# Altium PCB Root.PcbDoc
Units mm, origin at the board's own origin, x right, y up, seen from the top; angles counter-clockwise.
Board outline 42.75 x 55.75 mm, 2 copper layers (Top Layer, Bottom Layer); 56 components, 34 nets, 199 pads, 46 vias.
Unrouted connection lines stored in the file: 140.
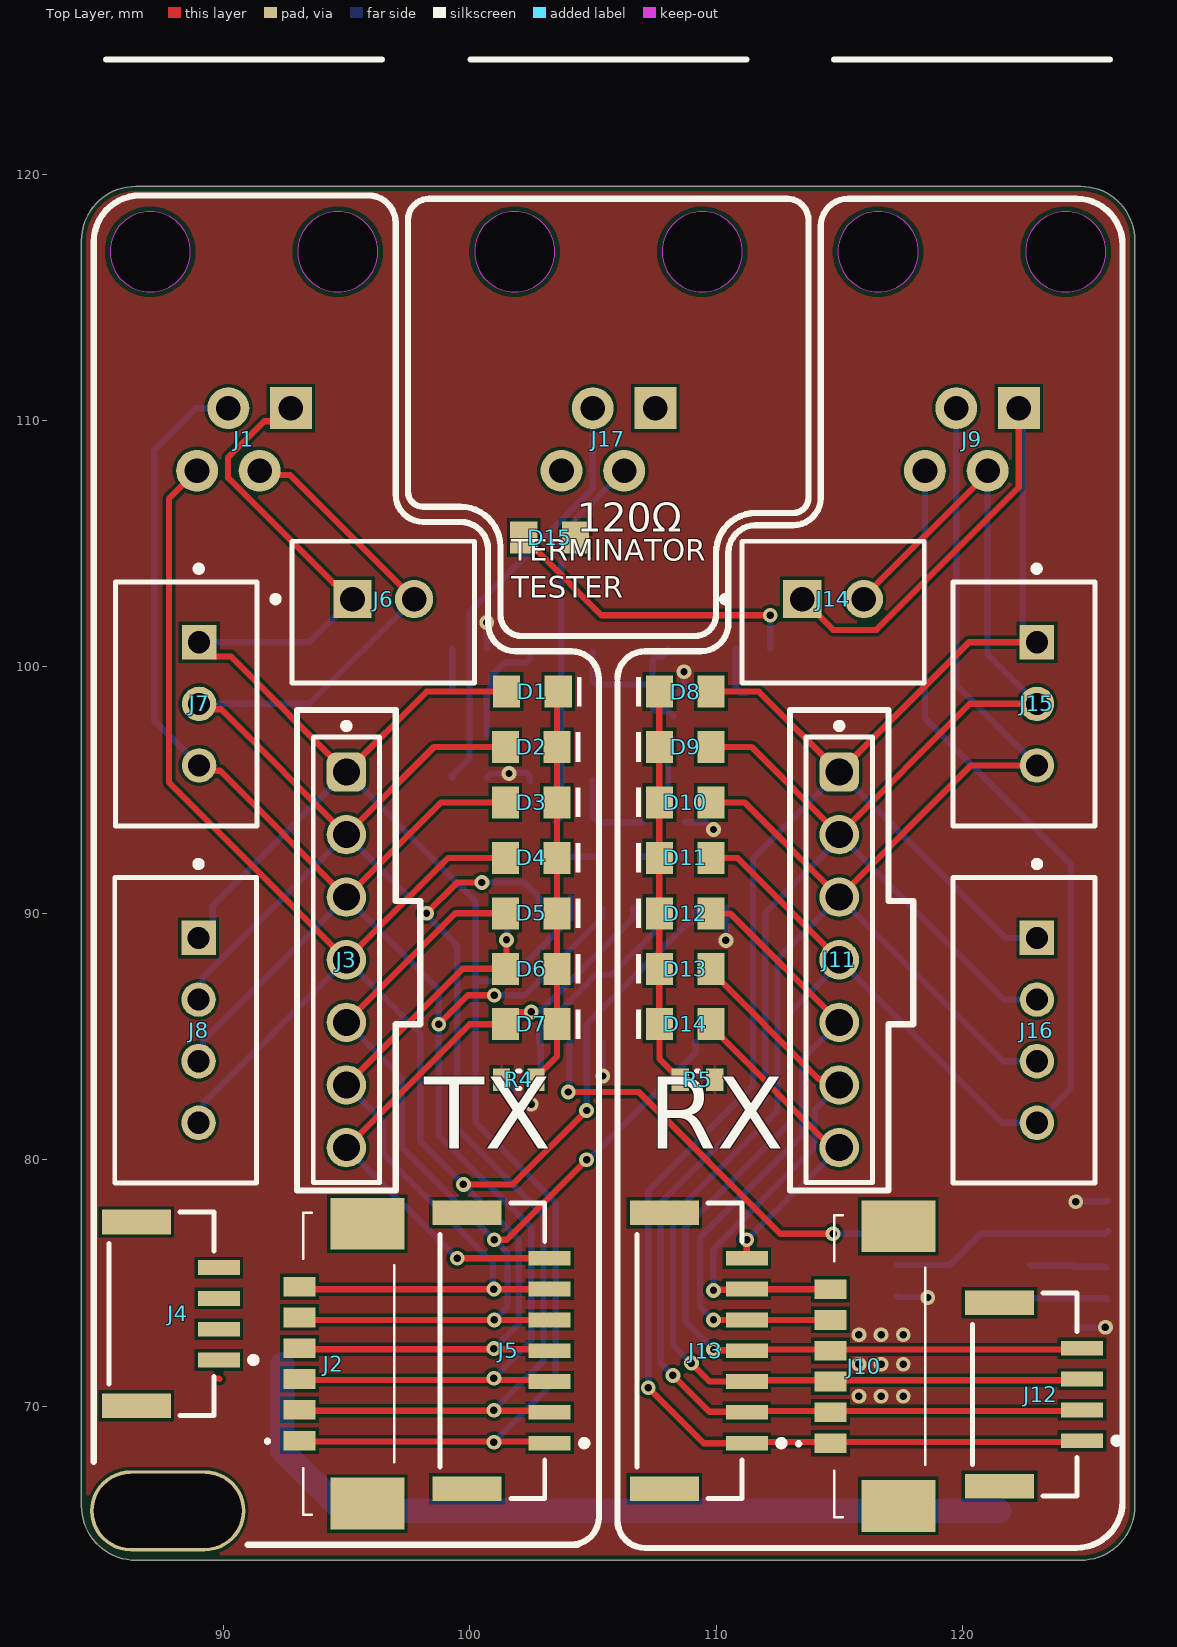
[diagram p0: Top Layer view]
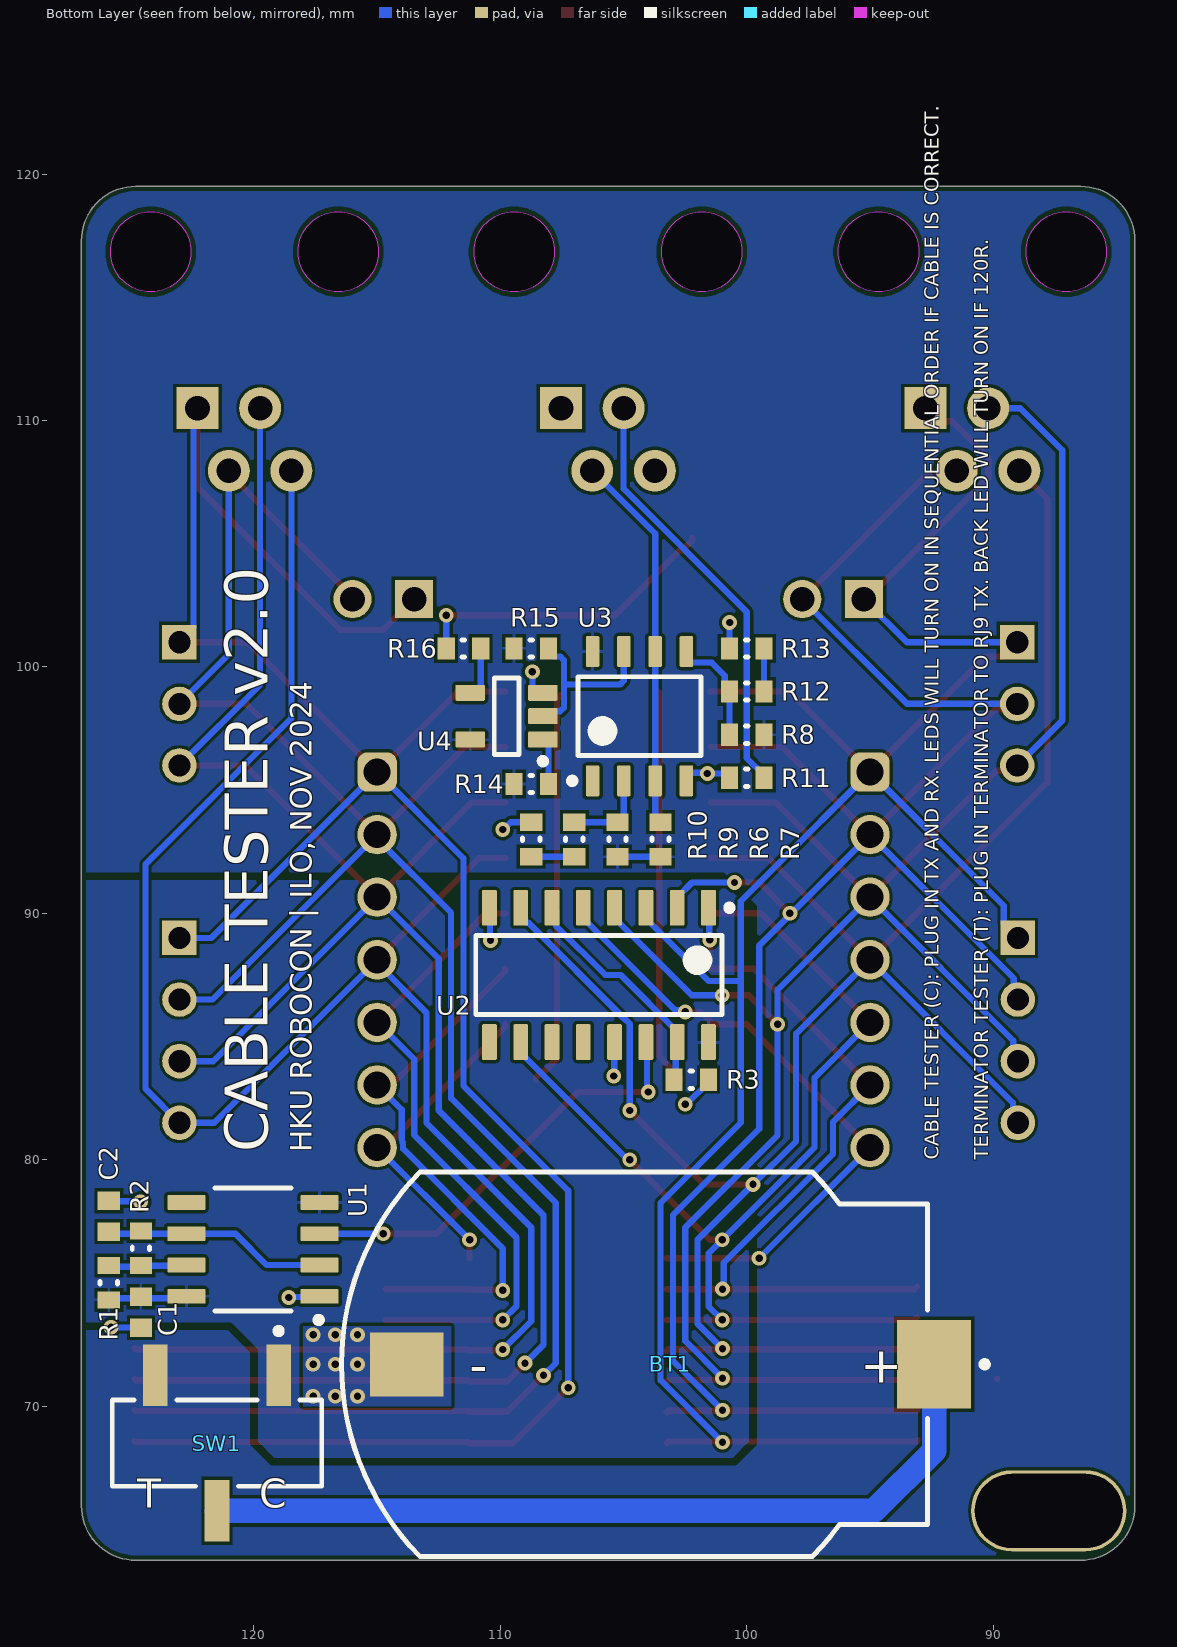
[diagram p1: Bottom Layer view, seen from below]
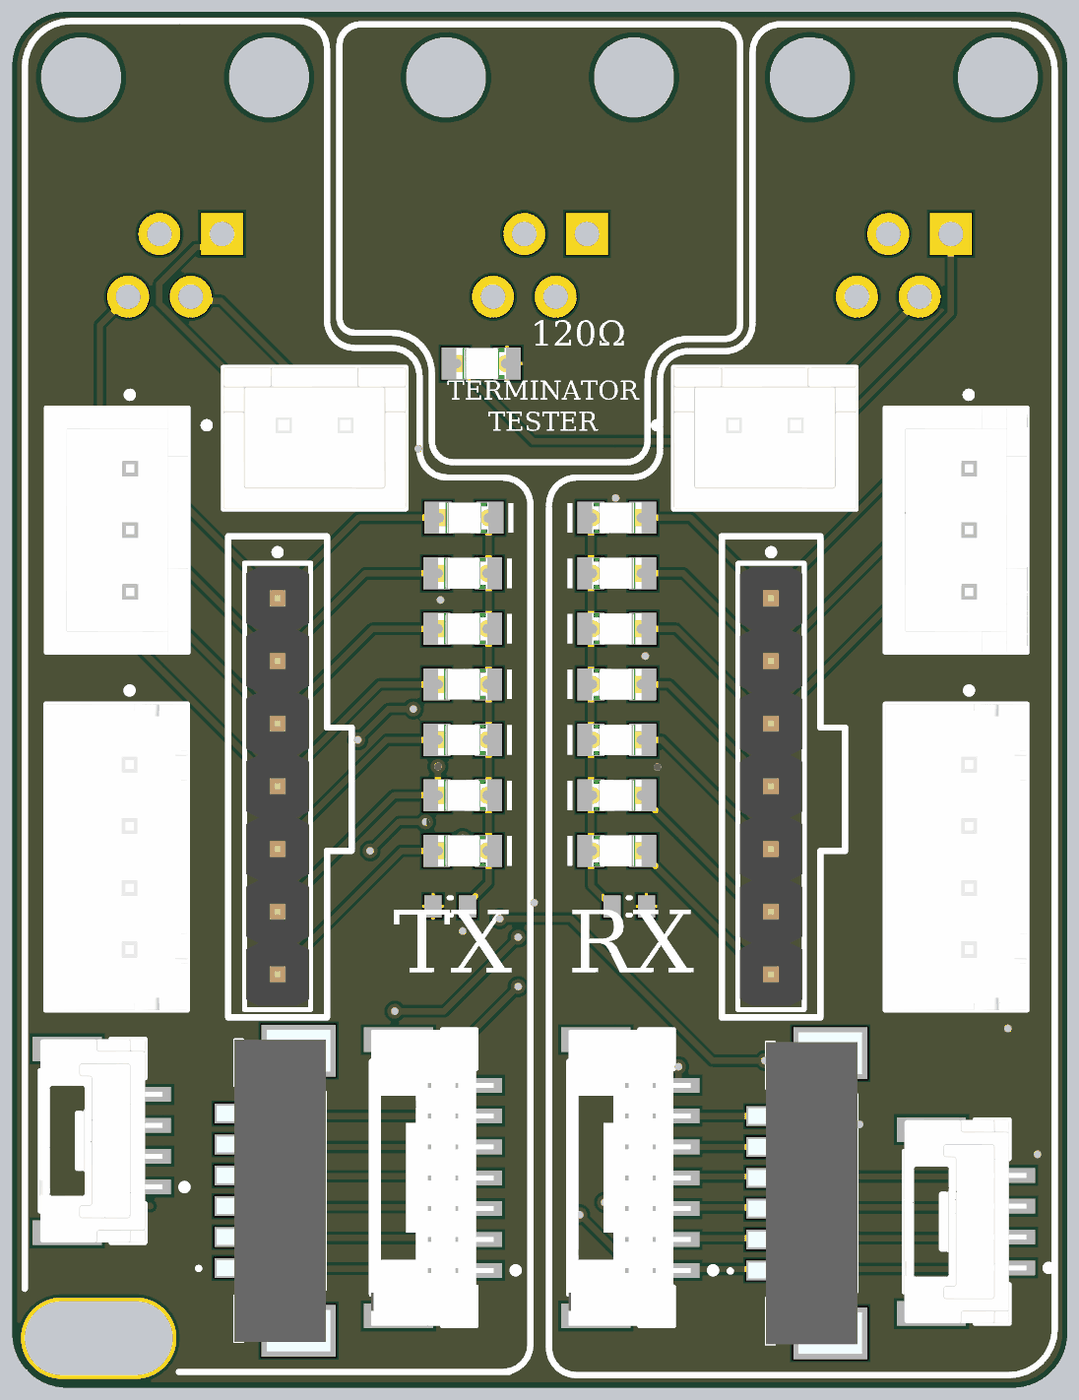
[diagram p2: 3D render of the assembled board from above, using the file's embedded part models]

## Layer stack, top to bottom
Top Solder: solder mask 0.0102, Solder Resist, Dk 3.5
Top Layer: signal copper 0.0356
Dielectric 1: dielectric 0.32, FR-4, Dk 4.8
Bottom Layer: signal copper 0.0356
Bottom Solder: solder mask 0.0102, Solder Resist, Dk 3.5

## Board outline
84.25,65.95 84.25,117.3 cw(c86.45,117.3) 86.45,119.5 124.8,119.5 cw(c124.8,117.3) 127,117.3 127,65.95 cw(c124.8,65.95) 124.8,63.75 86.45,63.75 cw(c86.45,65.95)

## Design rules (kind name [scope] priority, off if disabled: settings)
BoardOutlineClearance [All] p1: gap=0.2 ignorepadtopadclearanceinfootprint=FALSE
Clearance [All] p1: gap=0.127 ignorepadtopadclearanceinfootprint=FALSE except(0.25: Arc-Hole Track-Hole SMDPad-Hole THPad-Hole Via-Hole Fill-Hole Poly-Hole Region-Hole Text-Hole)
ComponentClearance [All] p1: gap=0.127 collisioncheckmode=3 verticalgap=0.127 showdistances=TRUE
DiffPairsRouting [All] p1: maxlimit=0.254 minlimit=0.127 mostfreqgap=0.127 toplayer_minwidth=0.127 toplayer_maxwidth=25.4 toplayer_prefwidth=0.127 bottomlayer_minwidth=0.127 bottomlayer_maxwidth=25.4 bottomlayer_prefwidth=0.127 maxuncoupledlength=12.7
Height [All] p1: minheight=0 maxheight=1816.048 prefheight=12.7
HoleSize [All] p1: absolutevalues=TRUE maxlimit=6.3 minlimit=0.3 maxpercent=80.000 minpercent=20.000
HoleToHoleClearance [All] p1: gap=0.25 allowstackedmicrovias=FALSE
MinimumAnnularRing [All] p1: minimumring=0.076
MinimumSolderMaskSliver [All] p1: minsoldermaskwidth=0
PlaneClearance [All] p1: clearance=0.127
PlaneConnect PlaneConnectPowerPads [InPadClass('PowerPads')] p1: planeconnectstyle=Direct reliefexpansion=0.508 reliefentries=4 reliefconductorwidth=0.254 reliefairgap=0.254
PlaneConnect [All] p2: pad.planeconnectstyle=Relief pad.reliefexpansion=0.3 pad.reliefentries=4 pad.reliefconductorwidth=0.127 pad.reliefairgap=0.127 via.planeconnectstyle=Direct via.reliefexpansion=0.3 via.reliefentries=4 via.reliefconductorwidth=0.127 via.reliefairgap=0.127
PolygonConnect PolygonConnectPowerPads [All vs (InPadClass('PowerPads'))] p1: connectstyle=Direct reliefconductorwidth=0.254 reliefentries=4 polygonreliefangle="90 Angle" airgapwidth=0.254
PolygonConnect [All] p2: thpad.connectstyle=Relief thpad.reliefconductorwidth=0.127 thpad.reliefentries=4 thpad.polygonreliefangle="90 Angle" thpad.airgapwidth=0.127 smdpad.connectstyle=Relief smdpad.reliefconductorwidth=0.127 smdpad.reliefentries=4 smdpad.polygonreliefangle="90 Angle" smdpad.airgapwidth=0.127 via.connectstyle=Direct via.reliefconductorwidth=0.127 via.reliefentries=4 via.polygonreliefangle="90 Angle" via.airgapwidth=0.127
RoutingVias [All] p1: holewidth=0.3 width=0.6 viastyle="Through Hole" minholewidth=0.3 minwidth=0.6 maxholewidth=0.6 maxwidth=6.6
SilkToSilkClearance [All] p1: silktosilkclearance=0
SilkToSolderMaskClearance [IsPad] p1: minsilkscreentomaskgap=0.127 clearancetoexposedcopper=TRUE
SolderMaskExpansion [All] p1: expansion=0.075 istentingtop=FALSE
Width [All] p1: maxlimit=25.4 minlimit=0.127 preferedwidth=0.127 minimp=50.000000 maximp=50.000000 favimp=50.000000
20 further rules are at their usual default settings.

## Components (designator, comment, footprint, x,y, rotation, side; value= is the part's Value field where it differs from the comment)
BT1 "S8421-45R" HRWN-S8421-45R_V 105.3,71.7 r90 bottom
C1 "100nF 0603" CAPC1608X92X38LL15T08 124.589,73.813 r270 bottom
C2 "10uF 0603" CAPC1608X92X38LL15T08 125.889,77.713 r90 bottom
D1 "Green 0805" WL-SMCW_0805_150080xx75000 102.55,99 r180 top
D2 "Green 0805" WL-SMCW_0805_150080xx75000 102.5,96.75 r180 top
D3 "Green 0805" WL-SMCW_0805_150080xx75000 102.5,94.5 r180 top
D4 "Green 0805" WL-SMCW_0805_150080xx75000 102.5,92.25 r180 top
D5 "Green 0805" WL-SMCW_0805_150080xx75000 102.5,90 r180 top
D6 "Green 0805" WL-SMCW_0805_150080xx75000 102.5,87.75 r180 top
D7 "Green 0805" WL-SMCW_0805_150080xx75000 102.5,85.5 r180 top
D8 "Green 0805" WL-SMCW_0805_150080xx75000 108.75,99 r0 top
D9 "Green 0805" WL-SMCW_0805_150080xx75000 108.75,96.75 r0 top
D10 "Green 0805" WL-SMCW_0805_150080xx75000 108.75,94.5 r0 top
D11 "Green 0805" WL-SMCW_0805_150080xx75000 108.75,92.25 r0 top
D12 "Green 0805" WL-SMCW_0805_150080xx75000 108.75,90 r0 top
D13 "Green 0805" WL-SMCW_0805_150080xx75000 108.75,87.75 r0 top
D14 "Green 0805" WL-SMCW_0805_150080xx75000 108.75,85.5 r0 top
D15 "Green 0805" WL-SMCW_0805_150080xx75000 103.25,105.25 r180 top
J1 "95501-2441" RJ45-TH_95501-2441 90.845,109.23 r180 top
J2 "0533980671" 0533980671 95.1,71.725 r90 top
J3 "2.54mm 7P" 61300711121 95,88.115 r270 top
J4 "BM04B-GHS-TBT(LF)(SN)" FP-BM04B-GHS-TBT_LF_SN-MFG 87.5,73.75 r270 top
J5 "BM07B-GHS-TBT (LF)(SN)" FP-BM07B-GHS-TBT_LF_SN-MFG 100.925,72.25 r270 top
J6 "B2B-XH-A(LF)(SN)" FP-B2B-XH-A_LF_SN-MFG 96.5,102.225 r0 top
J7 "B3B-XH-A(LF)(SN)" FP-B3B-XH-A_LF_SN-MFG 88.5,98.5 r270 top
J8 "B4B-XH-A(LF)(SN)" FP-B4B-XH-A_LF_SN-MFG 88.475,85.25 r90 top
J9 "95501-2441" RJ45-TH_95501-2441 120.385,109.23 r180 top
J10 "0533980671" 0533980671 116.65,71.625 r90 top
J11 "2.54mm 7P" 61300711121 115,88.115 r270 top
J12 "BM04B-GHS-TBT(LF)(SN)" FP-BM04B-GHS-TBT_LF_SN-MFG 122.525,70.475 r270 top
J13 "BM07B-GHS-TBT (LF)(SN)" FP-BM07B-GHS-TBT_LF_SN-MFG 108.925,72.25 r270 top
J14 "B2B-XH-A(LF)(SN)" FP-B2B-XH-A_LF_SN-MFG 114.75,102.225 r0 top
J15 "B3B-XH-A(LF)(SN)" FP-B3B-XH-A_LF_SN-MFG 122.5,98.5 r270 top
J16 "B4B-XH-A(LF)(SN)" FP-B4B-XH-A_LF_SN-MFG 122.5,85.25 r90 top
J17 "95501-2441" RJ45-TH_95501-2441 105.635,109.23 r180 top
R1 "10k 0603" RESC0603(1608)_L 125.889,75.013 r270 bottom value="120.00 Ohm"
R2 "10k 0603" RESC0603(1608)_L 124.589,76.413 r270 bottom value="120.00 Ohm"
R3 "10k 0603" RESC0603(1608)_L 102.25,83.25 r0 bottom value="120.00 Ohm"
R4 "470R 0603" RESC0603(1608)_L 102,83.25 r0 top value="120.00 Ohm"
R5 "470R 0603" RESC0603(1608)_L 109.25,83.25 r180 top value="120.00 Ohm"
R6 "22k 0603" RESC0603(1608)_L 105.25,93 r270 bottom value="120.00 Ohm"
R7 "220R 0603" RESC0603(1608)_L 103.5,93 r270 bottom value="120.00 Ohm"
R8 "22k 0603" RESC0603(1608)_L 100,97.25 r180 bottom value="120.00 Ohm"
R9 "10k 0603" RESC0603(1608)_L 107,93 r90 bottom value="120.00 Ohm"
R10 "1.8k 0603" RESC0603(1608)_L 108.75,93 r270 bottom value="120.00 Ohm"
R11 "0R 0603" RESC0603(1608)_L 100,95.5 r180 bottom value="120.00 Ohm"
R12 "10k 0603" RESC0603(1608)_L 100,99 r0 bottom value="120.00 Ohm"
R13 "2.2k 0603" RESC0603(1608)_L 100,100.75 r180 bottom value="120.00 Ohm"
R14 "10k 0603" RESC0603(1608)_L 108.75,95.25 r0 bottom value="120.00 Ohm"
R15 "10k 0603" RESC0603(1608)_L 108.75,100.75 r0 bottom value="120.00 Ohm"
R16 "470R 0603" RESC0603(1608)_L 111.5,100.75 r180 bottom value="120.00 Ohm"
SW1 "JS102011SCQN" FP-JS102011SCQN-MFG 121.5,68.5 r0 bottom
U1 "LMC555CMX/NOPB" FP-D0008A-MFG 120.039,76.363 r0 bottom
U2 "CD74HC4017M" D0016A_N 106,87.5 r270 bottom
U3 "LM393M" D0008A_L 104.355,98 r90 bottom
U4 "SN74LVC1G08DBVR" DBV0005A_M 109.75,98 r0 bottom

## Footprints (in the part's own frame and the unit in brackets; to place one, negate y for a bottom-side part, rotate by r counter-clockwise, add the part's x,y. Pads: shape width x height; smd on the part's side, far side on the other; paste and mask are expansions set on the pad)
0533980671 [mm]
  rect 0.8x1.3 smd: 1(-3.125,2) 2(-1.875,2) 3(-0.625,2) 4(0.625,2) 5(1.875,2) 6(3.125,2)
  rect 2.1x3 smd: MP1(-5.675,-0.75) MP2(5.675,-0.75)
  silkscreen extent -6.12,-1.85 6.12,3.35, body extent -6.52,-2.04 6.52,2.57, height 4.8
61300711121 [mm] "Pin Header, pitch 2.54 mm, THT, Vertical, single row, 7p"
  rrect50% 1.6x1.6 hole 1.1: 1(-7.62,0)
  round 1.6 hole 1.1: 2(-5.08,0) 3(-2.54,0) 4(0,0) 5(2.54,0) 6(5.08,0) 7(7.62,0)
  silkscreen extent -9.61,-1.35 9.04,1.35, body extent -8.89,-1.27 8.89,1.27, height 8.57
CAPC1608X92X38LL15T08 [mm] "Chip Capacitor, 2-Leads, Body 1.60x0.80mm, IPC High Density"
  rect 0.75x0.9 smd: 1(-0.625,0) 2(0.625,0)
  body extent -0.87,-0.48 0.87,0.48, height 0.92
D0008A_L [mm] "SOIC, 8-Leads, Body 5x4mm, Pitch 1.27mm, IPC High Density"
  rrect18% 1.25x0.55 smd: 1(-2.625,1.905) 2(-2.625,0.635) 3(-2.625,-0.635) 4(-2.625,-1.905) 5(2.625,-1.905) 6(2.625,-0.635) 7(2.625,0.635) 8(2.625,1.905)
  silkscreen extent -2.75,-2.5 1.6,2.86, body extent -3,-2.45 3,2.45, height 1.63
D0016A_N [mm] "SOIC, 16-Leads, Body 10x4mm, Pitch 1.27mm, IPC Medium Density"
  rrect17% 1.45x0.6 smd: 1(-2.725,4.445) 2(-2.725,3.175) 3(-2.725,1.905) 4(-2.725,0.635) 5(-2.725,-0.635) 6(-2.725,-1.905) 7(-2.725,-3.175) 8(-2.725,-4.445) 9(2.725,-4.445) 10(2.725,-3.175) 11(2.725,-1.905) 12(2.725,-0.635) 13(2.725,0.635) 14(2.725,1.905) 15(2.725,3.175) 16(2.725,4.445)
  silkscreen extent -2.85,-5 1.6,5.42, body extent -3,-4.95 3,4.95, height 1.59
DBV0005A_M [mm] "SOT23, 5-Leads, Body 3.05x1.75mm, Pitch 0.95mm, IPC Low Density"
  rrect15% 1.2x0.65 smd: 1(-1.475,0.95) 2(-1.475,0) 3(-1.475,-0.95) 4(1.475,-0.95) 5(1.475,0.95)
  silkscreen extent -1.6,-1.55 0.5,1.95, body extent -1.42,-1.46 1.42,1.46, height 1.08
FP-B2B-XH-A_LF_SN-MFG [mm]
  rect 1.55x1.55 hole 1 paste-1000 mask+0: 1(-1.25,0.525)
  round 1.55 hole 1 paste-1000 mask+0: 2(1.25,0.525)
  silkscreen extent -4.5,-2.88 3.7,2.88, body extent -3.8,-2.98 3.8,2.98, height 0.25
FP-B3B-XH-A_LF_SN-MFG [mm]
  rect 1.4x1.4 hole 0.9 paste-1000 mask+0: 1(-2.5,0.525)
  round 1.4 hole 0.9 paste-1000 mask+0: 2(0,0.525) 3(2.5,0.525)
  silkscreen extent -5.61,-2.88 4.95,2.88, body extent -5.05,-2.98 5.05,2.98, height 0.25
FP-B4B-XH-A_LF_SN-MFG [mm]
  rect 1.4x1.4 hole 0.9 paste-1000 mask+0: 1(3.75,-0.525)
  round 1.4 hole 0.9 paste-1000 mask+0: 2(1.25,-0.525) 3(-1.25,-0.525) 4(-3.75,-0.525)
  silkscreen extent -6.2,-2.88 6.87,2.88, body extent -6.3,-2.98 6.3,2.98, height 0.25
FP-BM04B-GHS-TBT_LF_SN-MFG [mm]
  rect 0.6x1.7 smd paste+0 mask+0: 1(1.875,2.325) 2(0.625,2.325) 3(-0.625,2.325) 4(-1.875,2.325)
  rect 1x2.8 smd paste+0 mask+0: 5(-3.725,-1.025) 6(3.725,-1.025)
  silkscreen extent -4.13,-2.12 4.13,3.85, body extent -4.33,-2.52 4.33,3.27, height 0.25
FP-BM07B-GHS-TBT_LF_SN-MFG [mm]
  rect 0.6x1.7 smd paste+0 mask+0: 1(3.75,2.325) 2(2.5,2.325) 3(1.25,2.325) 4(0,2.325) 5(-1.25,2.325) 6(-2.5,2.325) 7(-3.75,2.325)
  rect 1x2.8 smd paste+0 mask+0: 8(-5.6,-1.025) 9(5.6,-1.025)
  silkscreen extent -6,-2.12 6,3.85, body extent -6.2,-2.52 6.2,3.27, height 0.25
FP-D0008A-MFG [mm]
  rrect17% 1.55x0.6 smd paste+0 mask+0: 1(-2.7,1.905) 2(-2.7,0.635) 3(-2.7,-0.635) 4(-2.7,-1.905) 5(2.7,-1.905) 6(2.7,-0.635) 7(2.7,0.635) 8(2.7,1.905)
  silkscreen extent -2.79,-2.5 1.55,2.99, body extent -3,-2.45 3,2.45, height 1.75
FP-JS102011SCQN-MFG [mm]
  rect 1x2.5 smd paste+0 mask+0: 1(-2.5,-2.75) 2(0,2.75) 3(2.5,-2.75)
  silkscreen extent -4.25,-4.67 4.25,1.75, body extent -4.25,-3.75 4.25,3.75, height 5.5
HRWN-S8421-45R_V [mm] "Holder, 2-Leads, Body 23.79x15.6mm"
  rect 3.6x3 smd: 1(0,-12.9)
  rect 2.6x3 smd: 2(0,8.5)
  silkscreen extent -7.8,-15.07 7.8,11.15, body extent -7.8,-12.64 7.8,11.15, height 5.4
RESC0603(1608)_L [mm] "Chip Resistor, Body 1.6x0.8mm, IPC High Density"
  rect 0.7x0.9 smd: 1(-0.7,0) 2(0.7,0)
  silkscreen extent -0.05,-0.35 0.05,0.35, body extent -0.85,-0.47 0.85,0.47, height 0.6
RJ45-TH_95501-2441 [mm]
  rect 1.7x1.7 hole 1 paste+0 mask+0.051: 1(-1.905,-1.27)
  round 1.7 hole 1 paste+0 mask+0.051: 2(-0.635,1.27) 3(0.635,-1.27) 4(1.905,1.27)
  Keep-Out Layer board cut-out: -2.185,-7.62 -2.185,-7.46 -2.247,-7.146 -2.37,-6.85 -2.548,-6.584 -2.774,-6.358 -3.04,-6.18 -3.336,-6.057 -3.65,-5.995 -3.97,-5.995 -4.284,-6.057 -4.58,-6.18 -4.846,-6.358 -5.072,-6.584 -5.25,-6.85 -5.373,-7.146 -5.435,-7.46 -5.435,-7.62 -5.435,-7.78 -5.373,-8.094 -5.25,-8.39 -5.072,-8.656 -4.846,-8.882 -4.58,-9.06 -4.284,-9.183 -3.97,-9.245 -3.65,-9.245 -3.336,-9.183 -3.04,-9.06 -2.774,-8.882 -2.548,-8.656 -2.37,-8.39 -2.247,-8.094 -2.185,-7.78 -2.185,-7.62 -2.185,-7.62
  Keep-Out Layer board cut-out: 5.435,-7.62 5.435,-7.46 5.373,-7.146 5.25,-6.85 5.072,-6.584 4.846,-6.358 4.58,-6.18 4.284,-6.057 3.97,-5.995 3.65,-5.995 3.336,-6.057 3.04,-6.18 2.774,-6.358 2.548,-6.584 2.37,-6.85 2.247,-7.146 2.185,-7.46 2.185,-7.62 2.185,-7.78 2.247,-8.094 2.37,-8.39 2.548,-8.656 2.774,-8.882 3.04,-9.06 3.336,-9.183 3.65,-9.245 3.97,-9.245 4.284,-9.183 4.58,-9.06 4.846,-8.882 5.072,-8.656 5.25,-8.39 5.373,-8.094 5.435,-7.78 5.435,-7.62 5.435,-7.62
  silkscreen extent -5.59,-15.42 5.59,-15.42
WL-SMCW_0805_150080xx75000 [mm] "SMD Mono-color Chip LED, body 2.0x1.25mm"
  rect 1.1x1.3 smd: 1(-1.05,0) 2(1.05,0)
  silkscreen extent -2,-0.6 -1.8,0.6, body extent -1,-0.63 1,0.62, height 0.7

## Part data
BT1: library part CMP-2000-07028-1, "Bettery Coin Cell Holder, Suitable for CR2032, -40 to 105 degC, 2-Pin SMD, RoHS, Tape and Reel", Manufacturer=Harwin, Package Description="2-Pin Surface Mount Holder, Body 23.79 x 15.6 mm", Battery Cell Size=20mm, Brand=Harwin, Contact Plating=PhosphorBronze, Datasheet URL=https://cdn.harwin.com/pdfs/S8421R.pdf, Datasheet Version="Rev. 3, 01/2014", Dimensions=20mm, Factory Pack Quantity=500, Manufacturer URL=https://www.harwin.com/, Material=PolyphenyleneSulfide(PPS), Mounting Style=SMD/SMT, Mounting Technology=SurfaceMount, Number of Batteries=1, Package Reference=S8421-45R, Packaging=Reel, Product=BatteryHolders, Product Category=CoinCellBatteryHolders, RoHS=Details, Series=S8, Tradename=EZBoardware, Type=BatteryRetainer
C1 C2: library part CMP-2006-01972-1, Manufacturer=Vitramon, Part Number=VJ0603Y103KXAAC
D1 D2 D3 D4 D5 D6 D7 D8 D9 D10 D11 D12 D13 D14 D15: library part CMP-1426-00011-3, "LED Uni-Color Red 630nm 2-Pin Chip 0805(2012Metric) T/R"
J1 J9 J17: library part 955012441, JLCPCB Part Class="Extended Part", Manufacturer=MOLEX, Ratings=-, Add into BOM=yes, Connector Type=-, Convert to PCB=yes, Datasheet=https://atta.szlcsc.com/upload/public/pdf/source/20181030/C293728_4A841B363173D905FE7362B37B2768C3.pdf, Device=955012441, LCSC Part Name=955012441, LED=-, Manufacturer Part=955012441, Number of Ports=1, Shielding=-, Supplier=LCSC, Supplier Footprint=插件, Supplier Part=C293727, Symbol=955012441
J2 J10: "Connector", Manufacturer_Name=Molex, Arrow Part Number=0533980671, Arrow Price/Stock=https://www.arrow.com/en/products/0533980671/molex?region=nac, Datasheet Link=https://www.molex.com/pdm_docs/sd/533980671_sd.pdf, Height=4.7mm, Manufacturer_Part_Number=0533980671
J3 J11: library part CMP-1502-01074-3
J4 J12: library part CMP-17439-000062-1, "CONN HEADER SMD 4POS 1.25MM", Case/Package=SMD/SMT, Current Rating=1A, Housing Color=Natural, Max Operating Temperature=85°C, Min Operating Temperature=-25°C, Voltage Rating=50V, Contact Material=Bronze, Contact Plating=Tin, Gender=Male, Housing Material=Nylon, Lead Free="Lead Free", Number of Contacts=4, Number of Positions=4, Number of Rows=4, Orientation=Straight, Packaging="Cut Tape", Pitch=1.25mm, REACH SVHC="No SVHC", Series=GH, Termination=Crimp, Voltage Rating (AC)=50V, Wire/Cable Gauge=26AWG
J5 J13: library part CMP-17439-000607-1, "CONN HEADER SMD 7POS 1.25MM", Current Rating=1A, Housing Color=Natural, Max Operating Temperature=85°C, Min Operating Temperature=-25°C, Voltage Rating (AC)=50V, Contact Material=Bronze, Contact Plating=Tin, Housing Material=Nylon, Lead Free="Lead Free", Mount="Surface Mount", Number of Contacts=7, Number of Positions=7, Number of Rows=1, Packaging="Cut Tape", Pitch=1.25mm, Reach SVHC Compliant=Yes, Series=GH, Termination=SMD/SMT, Wire/Cable Gauge=26AWG
J6 J14: library part CMP-2000-05888-3, "CONN HEADER VERT 2POS 2.5MM"
J7 J15: library part CMP-17439-000014-1, "CONN HEADER VERT 3POS 2.5MM", Current Rating=3A, Manufacturer=JST, Package=0, Temperature="-25°C to +85°C", Temperature Range High=+85°C, Temperature Range Low=-25°C, Voltage Rating=250V, Automotive=No, Category=Conn, ComponentLink2Description=Datasheet, ComponentLink2URL=https://www.jst-mfg.com/product/pdf/eng/eXH.pdf, Conn Gender=Male, Conn Orientation=Vertical, Contact Material=Tin,Copper, Device Class L1=Connectors, Device Class L2="Headers and Wire Housings", Device Class L3=unset, Digikey Description="CONN HEADER VERT 3POS 2.5MM", Height=7mm, Lead Free=Yes, Manufacturer Part Number=B3B-XH-A(LF)(SN), Number of Contacts=3, Number of Rows=1, Octopart=https://octopart.com/b3b-xh-a%28lf%29%28sn%29-jst-3990185, Pitch=2.5mm, RoHS=TRUE
J8 J16: library part CMP-17439-000250-1, "CONN HEADER VERT 4POS 2.5MM", Color=Natural, Contact Resistance=20mR, Current Rating=3A, Flammability Rating="UL94 V-0", Housing Color=White, Insulation Resistance=1GR, Max Operating Temperature=85°C, Max Voltage Rating (AC)=250V, Min Operating Temperature=-25°C, Package Quantity=500, Connector Type=Header, Contact Finish - Mating=TIN, Contact Material=Brass, Contact Plating=Tin, Contact Shape=Square, Contact Type="Male Pin", Depth=5.75mm, Fastening Type=Detent, Gender=Male, Housing Material=Polyamide, Insulation Color=Natural, Insulation Material=Nylon, Lead Free="Lead Free", Lead Pitch=2.5mm, Length=12.4mm, Mated Stacking Heights=9.8mm, Material=Polyamide, Max Current Rating=3A, Max Voltage Rating (DC)=250V, Mount="Through Hole", Number of Contacts=4, Number of Positions=4, Number of Rows=1, Orientation=Straight, Packaging=Bulk, Pitch=2.5mm, REACH SVHC="No SVHC", Series=XH, Termination=Solder, Voltage Rating=250V, Voltage Rating (AC)=250V, Wire/Cable Gauge=22AWG
R1 R2 R3 R4 R5 R6 R7 R8 R9 R10 R11 R12 R13 R14 R15 R16: library part CMP-1012-00052-1, "120R 0.1W 5% 0603 (1608 Metric)  SMD", Case-EIA=0603, Case-Metric=1608, Power="0.1 W", Tolerance="5 %", Technology=SMT
SW1: library part CMP-10038-000023-1, "SWITCH SLIDE SPDT 300MA 6V", Actuator Color=Black, Case/Package=SMD/SMT, Contact Resistance=70mR, Current Rating=300mA, Max Operating Temperature=85°C, Max Voltage Rating (DC)=30V, Min Operating Temperature=-40°C, Package Quantity=4000, Voltage Rating (DC)=6V, Actuator Length=2mm, Actuator Material=Nylon, Actuator Type=Standard, Contact Material="Copper Alloy", Contact Plating=Silver, Depth=7.5mm, Electrical Life=5000Cycles, Housing Material=Nylon, Length=8.5mm, Max Current Rating=300mA, Mount="Surface Mount", Orientation=Straight, Packaging="Tape and Reel", Radiation Hardening=No, RoHS Compliant=Yes, Series=JS, Switch Function=On-On, Switch Travel=2mm, Termination="Gull Wing", Throw Configuration=SPDT
U1: library part CMP-04858-000001-1, "IC OSC SINGLE TIMER 3MHZ 8-SOIC", Frequency=3MHz, Manufacturer="Texas Instruments", Max Supply Voltage=15V, Min Supply Voltage=1.5V, Nominal Supply Current=50-150uA, Package=D0008A, Temperature="-40°C to +85°C", Temperature Range High=+85°C, Temperature Range Low=-40°C, Automotive=No, Category=IC, ComponentLink2Description=Datasheet, ComponentLink2URL=http://www.ti.com/general/docs/suppproductinfo.tsp?distId=10&gotoUrl=http%3A%2F%2Fwww.ti.com%2Flit%2Fgpn%2Flmc555, Device Class L1="Integrated Circuits (ICs)", Device Class L2="Clock and Timing", Device Class L3="Timers and Oscillators", Digikey Description="IC OSC SINGLE TIMER 3MHZ 8-SOIC", Height=1.75mm, Ipc Land Pattern Name=SOIC127P600X175-8, Lead Free=Yes, Manufacturer Part Number=LMC555CMX/NOPB, Mouser Description="Timers & Support Products CMOS TIMER", Number Of Timers/Counters=1, Octopart=https://octopart.com/lmc555cmx%2Fnopb-texas+instruments-24815227, Propagation Delay=100ns, RoHS=TRUE, Standoff Height=0.11mm
U2: library part CMP-1623-00115-2, "High Speed CMOS Logic Decade Counter/Divider with 10 Decoded Outputs, D0016A, TUBE", F @ Nom Voltage(Max)(Mhz)=28, Generic Part Number=CD74HC4017, ICC @ Nom Voltage(Max)(mA)=0.08, Manufacturer="Texas Instruments", Operating Temperature Range(C)="-55 to 125", Rating=Catalog, tpd @ Nom Voltage(Max)(ns)=54, Voltage(Nom)(V)=3.3,5, Bits(#)=10, Code_JEDEC="MS-012 variation AC", DatasheetVersion=SCHS200D, Function=Counter, Input Type=LVTTL/CMOS, Inputs=1, Output Drive (IOL/IOH)(Max)(mA)=5.2/-5.2, Output Type=CMOS, PackageReference=D0016A, Schmitt Trigger=No, Technology Family=HC, Type=Decade, VCC(Max)(V)=6, VCC(Min)(V)=2
U3: library part CMP-0055-00682-3, "Low Power Low Offset Voltage Dual Comparator, 8-pin Narrow SOIC", Manufacturer="Texas Instruments", Package Reference=D0008A, PackageTopMarking=NSZXTT*LM*393M, PowerWise=N, Code_IPC=SOIC127P600-8, Code_JEDEC=MS-012-AA, ComponentLink1Description="Datasheet URL", ComponentLink1URL=http://www.ti.com/general/docs/lit/getliterature.tsp?genericPartNumber=LM393-N&fileType=pdf, CompType=Amplifiers, PackageDescription="SOIC Narrow, 4.9 x 3.9 x 1.45mm, 8 Lead, 1.27mm Pitch", PinCount=8, RoHS=N
U4: library part CMP-0859-00053-3, "Single 2-Input Positive-AND Gate, DBV0005A, LARGE T&R", F @ Nom Voltage(Max)(Mhz)=150, Generic Part Number=SN74LVC1G08, ICC @ Nom Voltage(Max)(mA)=0.01, Manufacturer="Texas Instruments", Operating Temperature Range(C)="-40 to 125,-40 to 85", Rating=Catalog, tpd @ Nom Voltage(Max)(ns)=4.5,6,4,5, Voltage(Nom)(V)=1.8,2.5,3.3,5, 3-State Output=No, Bits(#)=1, DatasheetVersion=SCES217Y, Gate Type=AND, Input Type=CMOS/TTL, Logic=True, Output Drive (IOL/IOH)(Max)(mA)=32/-32, Output Type=CMOS, PackageReference=DBV0005A, Schmitt Trigger=No, Sub-Family="AND Gate", Technology Family=LVC, VCC(Max)(V)=5.5, VCC(Min)(V)=1.65

## Free pads (board coordinates)
  rrect100% 6.3x3.3 hole 3 slot 6 at 0 deg paste-1000 mask+0: 2(87.75,65.75)

## Via types
v1: diameter 0.6, hole 0.3, Top Layer to Bottom Layer, tented both sides, 46 vias

## Nets (pads, with @x,y where several pads share a name; then routed paths per layer and width w, separated by ;. In a path a pad name is that pad's centre, name@x,y a point inside that pad or via, vN(x,y) a via of type N, cw(c..) or ccw(c..) an arc to the next point about the centre after c; other vN are vias at no path point)
3V3: BT1.1 SW1.2 | length 33.6
  Bottom Layer w1: BT1.1 92.4,68.2 94.85,65.75 SW1.2
3V3_CONN: C1.1 R1.2 SW1.1 U1.4 U1.8 U2.16 | length 3.2
  Bottom Layer w0.254: U1.8 122.811,74.385 125.816,74.385 R1.2
3V3_TERM: R6.2 R7.2 R8.2 R14.2 R15.2 SW1.3 U3.8 U4.5 | length 1.8
  Bottom Layer w0.254: R7.2 R6.2
CLOCK: U1.3 U2.14 | length 17.8
  Top Layer w0.254: v1(104,82.75) 106.862,82.75 112.612,77 v1(114.75,77)
  Bottom Layer w0.254: v1(104,82.75) 104.048,82.798 104.048,84.728 U2.14 ; v1(114.75,77) 114.751,76.999 U1.3 U1.3
GND: BT1.2 C1.2 C2.2 D15.1 R3.1 R4.1 R5.1 R10.1 R11.1 R13.1 U1.1 U2.8 U2.13 U3.4 U4.3 | length 13.5
  Bottom Layer w0.254: R11.1 100.873,95.673 v1(101.6,95.673) ; R13.1 v1(100.7,101.8) ; R3.1 101.55,83.15 102.45,82.25 v1(102.5,82.25) ; v1@101.6,95.7 102.302,95.7 102.45,95.552 U3.4 ; U2.13 105.382,84.758 105.382,83.418 v1(105.4,83.4) ; U4.3 108.502,98.95 108.7,99.148 v1(108.7,99.8) ; R10.1 109.579,93.7 v1@109.879,93.4 ; v1(110.4,88.9) 110.422,88.922 110.422,90.203 U2.8 ; U1.1 117.361,74.435 118.566,74.435 v1(118.589,74.413) ; C1.2 124.595,73.194 125.794,73.194 v1(125.8,73.2) ; v1(124.6,78.3) 124.619,78.319 125.87,78.319 C2.2
  other v1: 115.8,70.4 116.7,70.4 117.6,70.4 115.8,71.7 116.7,71.7 117.6,71.7 115.8,72.9 116.7,72.9 117.6,72.9 109.9,93.4
GT_118R: R14.1 U3.1 U4.1 | length 1.9
  Bottom Layer w0.254: R14.1 108.05,96.852 108.248,97.05 U4.1
LT_122R: R15.1 U3.7 U4.2 | length 7.5
  Bottom Layer w0.254: U3.7 104.99,99.433 105.139,99.285 107.421,99.285 ; R15.1 108.05,100.65 107.827,100.427 107.57,100.427 107.421,100.278 107.421,99.285 ; U4.2 108.077,98.198 107.57,98.198 107.421,98.347 107.421,99.285
NetC2_1: C2.1 R2.1 U1.2 U1.6 | length 9.1
  Bottom Layer w0.254: U1.2 119.478,75.728 120.748,76.998 U1.6 124.589,76.998 125.799,76.998 C2.1@125.914,77.113
NetD1_1: D1.1 D2.1 D3.1 D4.1 D5.1 D6.1 D7.1 R4.2 | length 16.3
  Top Layer w0.254: R4.2 102.7,83.35 103.55,84.2 D7.1 D6.1 D5.1 D4.1 D3.1 D2.1 103.55,98.95 D1.1 D1.1@103.7,98.9
NetD8_1: D8.1 D9.1 D10.1 D11.1 D12.1 D13.1 D14.1 R5.2 | length 16.1
  Top Layer w0.254: D8.1@107.55,98.85 107.7,98.7 D9.1 D10.1 D11.1 D12.1 D13.1 D14.1 107.703,85.497 107.703,84.097 108.227,83.573 108.327,83.573 108.55,83.35 R5.2
NetD15_2: D15.2 R16.1 | length 12.7
  Top Layer w0.254: D15.2 102.2,105.15 102.623,104.727 102.723,104.727 105.35,102.1 v1(112.2,102.1)
  Bottom Layer w0.254: R16.1 v1(112.2,102.1)
NetJ17_2: J17.2 R7.1 U3.3 U3.6 | length 15.4
  Bottom Layer w0.254: R7.1 103.72,93.92 U3.3 U3.6 103.72,105.41 J17.2
NetJ17_3: J17.3 R11.2 | length 17.4
  Bottom Layer w0.254: R11.2 99.3,95.6 100,96.3 100,102.229 105,107.229 J17.3
NetR1_1: R1.1 R2.2 U1.7 | length 3.1
  Bottom Layer w0.254: U1.7 122.771,75.695 124.506,75.695 124.539,75.663 125.789,75.663 R1.1@125.839,75.613
NetR9_1: R9.1 R10.2 | length 1.7
  Bottom Layer w0.254: R9.1 R10.2
NetR12_1: R12.1 R13.2 | length 1.8
  Bottom Layer w0.254: R12.1 R13.2
NetR16_2: R16.2 U4.4 | length 2.1
  Bottom Layer w0.254: R16.2 110.8,99.148 110.998,98.95 U4.4
REF_118R: R6.1 R9.2 U3.2 | length 3.6
  Bottom Layer w0.254: U3.2 104.99,93.923 105.213,93.7 R6.1 R9.2
REF_122R: R8.1 R12.2 U3.5 | length 4.6
  Bottom Layer w0.254: R8.1 R12.2 100.89,99.19 100.89,99.64 101.426,100.176 102.302,100.176 102.45,100.324 U3.5
RESET: R3.2 U2.6 U2.15 | length 9.5
  Bottom Layer w0.254: R3.2 102.888,83.313 102.888,84.713 U2.15 102.825,85.2 105.125,87.5 105.75,87.5 107.732,89.482 107.732,90.052 U2.6
RX_1: D8.2 J9.1 J10.1 J11.1 J12.1 J13.1 J14.1 J15.1 J16.1 | length 99.1
  Top Layer w0.254: v1(107.25,70.75) 109.5,68.5 J13.1 111.3,68.55 124.8,68.55 J12.1 ; D8.2 111.735,99 J11.1 120.265,101 J15.1 ; J14.1 114.75,101.5 116.5,101.5 122.29,107.29 J9.1
  Bottom Layer w0.254: v1(107.25,70.75) 107.25,78.75 111.5,83 111.5,92.235 J11.1 121.735,89 J16.1 ; J9.1 122.452,110.338 122.452,101.573 J15.1
RX_2: D9.2 J9.2 J10.2 J11.2 J12.2 J13.2 J14.2 J15.2 J16.2 | length 87.7
  Top Layer w0.254: v1(108.25,71.25) 109.725,69.775 111.225,69.775 J13.2 111.3,69.8 124.8,69.8 J12.2 ; D9.2 111.445,96.75 J11.2 120.305,98.5 J15.2 ; J14.2 116,102.845 121.02,107.865 J9.2
  Bottom Layer w0.254: v1(108.25,71.25) 107.75,71.75 107.75,78.25 112,82.5 112,90.017 115,93.017 J11.2 121.695,86.5 J16.2 ; J9.2 121.02,100.505 J15.2
RX_3: D10.2 J9.3 J10.3 J11.3 J12.3 J13.3 J15.3 J16.3 | length 81.9
  Top Layer w0.254: v1(109,71.75) 109.75,71 J13.3 111.3,71.05 124.8,71.05 J12.3 ; D10.2 111.155,94.5 J11.3 120.345,96 J15.3
  Bottom Layer w0.254: v1(109,71.75) 108.25,72.5 108.25,77.75 112.5,82 112.5,88.155 J11.3 121.655,84 J16.3 ; J9.3 119.75,99.275 J15.3
RX_4: D11.2 J9.4 J10.4 J11.4 J12.4 J13.4 J16.4 | length 81.1
  Top Layer w0.254: D11.2 110.865,92.25 J11.4 ; v1(109.9,72.3) 109.925,72.275 111.225,72.275 J13.4 111.3,72.3 124.8,72.3 J12.4
  Bottom Layer w0.254: v1(109.9,72.3) 108.75,73.45 108.75,77.25 113,81.5 113,85.976 115,87.976 J11.4 121.615,81.5 J16.4 124.4,82.875 124.4,91.996 118.48,97.916 J9.4
RX_5: D12.2 J10.5 J11.5 J13.5 | length 26.4
  Top Layer w0.254: D12.2 109.807,89.993 110.582,89.993 J11.5 ; v1(109.9,73.5) J13.5 J10.5
  Bottom Layer w0.254: v1(109.9,73.5) 109.346,74.054 109.346,76.846 113.5,81 113.5,84.075 J11.5
RX_6: D13.2 J10.6 J11.6 J13.6 | length 22.4
  Top Layer w0.254: D13.2 109.8,87.65 114.157,83.293 114.742,83.293 J11.6 ; v1(109.9,74.7) 109.925,74.725 111.225,74.725 J13.6 J10.6
  Bottom Layer w0.254: v1(109.9,74.7) 109.9,76.4 113.947,80.447 cw(c115,80.495) 114,80.828 114,82.035 J11.6
RX_7: D14.2 J11.7 J13.7 | length 13.4
  Top Layer w0.254: D14.2 109.8,85.4 114.705,80.495 J11.7 ; J13.7 v1(111.25,76.75)
  Bottom Layer w0.254: v1(111.25,76.75) 111.253,76.75 114.998,80.495 J11.7
TX_1: D1.2 J1.1 J2.1 J3.1 J4.1 J5.1 J6.1 J7.1 J8.1 U2.3 | length 91.2
  Top Layer w0.254: J7.1 89.598,100.427 90.308,100.427 J3.1 98.265,99 D1.2 ; J1.1 92.218,109.968 91.668,109.968 90.2,108.5 90.2,107.679 94.481,103.398 94.602,103.398 J6.1 ; J2.1@93.075,68.625 J2.1 ; J2.1@93.1,68.563 100.987,68.563 103.188,68.563 J5.1
  Bottom Layer w0.254: J8.1 89.573,89.573 89.573,90.308 J3.1 99,91.735 100.25,90.485 100.25,87.25 ; J7.1 93.5,101 J6.1 ; v1(100.987,68.537) 103.5,71.05 103.5,78.25 100.25,81.5 100.25,87.25 ; U2.3@104.095,90.65 U2.3 104.095,89.8 101.545,87.25 100.25,87.25
TX_2: D2.2 J1.2 J2.2 J3.2 J4.2 J5.2 J6.2 J7.2 J8.2 U2.2 | length 88.1
  Top Layer w0.254: J7.2 89.244,98.281 89.914,98.281 J3.2 98.555,96.75 D2.2 ; J1.2 91.651,107.789 92.711,107.789 J6.2 ; J2.2@93.075,69.875 J2.2 ; J2.2@93.1,69.813 100.987,69.813 103.188,69.813 J5.2 ; v1(98.25,90) 99.5,91.25 v1(100.5,91.25)
  Bottom Layer w0.254: J8.2 89.163,86.663 89.163,87.358 J3.2 99.5,88.695 99.5,81.25 103,77.75 103,71.85 v1(100.987,69.837) ; J7.2 93.5,98.5 J6.2 ; v1(100.5,91.25) 102.225,91.25 102.825,90.65 U2.2 U2.2@102.825,89.8
TX_3: D3.2 J1.3 J2.3 J3.3 J4.3 J5.3 J7.3 J8.3 U2.4 | length 84.9
  Top Layer w0.254: J7.3 89.244,95.781 89.874,95.781 J3.3 98.845,94.5 D3.2 ; 89.825,71.125 89.85,71.1 ; J2.3@93.1,71.063 100.987,71.063 103.188,71.063 J5.3 ; v1(98.75,85.5) 99.923,86.673 v1(101,86.673)
  Bottom Layer w0.254: J8.3 89.183,84.183 89.183,84.838 J3.3 98.75,86.905 v1(98.75,85.5) 98.75,81 102.5,77.25 102.5,72.65 v1(100.987,71.137) ; J7.3 87.2,97.825 87.2,108.8 88.9,110.5 J1.3 ; v1(101,86.673) 102.238,86.673 105.365,89.8 U2.4
TX_4: D4.2 J1.4 J2.4 J3.4 J4.4 J5.4 J8.4 U2.7 | length 86.2
  Top Layer w0.254: J1.4 88.94,107.957 87.8,106.817 87.8,95.315 J3.4 99.135,92.25 D4.2 ; J2.4@93.1,72.375 93.162,72.313 103.188,72.313 J5.4 ; v1(99.75,79) 101.75,79 v1(104.75,82)
  Bottom Layer w0.254: J8.4 89.203,81.703 89.203,82.318 J3.4 98,85.115 98,80.75 v1(99.75,79) 102,76.75 102,73.35 v1(100.987,72.337) ; v1(104.75,82) 104.75,85.514 104.99,85.754 105.004,85.754 108.877,89.627 109.002,89.627 109.175,89.8 U2.7
TX_5: D5.2 J2.5 J3.5 J5.5 U2.10 | length 45.2
  Top Layer w0.254: J2.5 93.2,73.5 J5.5 ; J3.5 99.425,90 D5.2 ; v1(101,76.75) 101.5,76.75 v1(104.75,80)
  Bottom Layer w0.254: J3.5 97.25,83.325 97.25,80.5 v1(101,76.75) 101.541,76.209 101.541,74.041 v1(101,73.5) ; v1(104.75,80) 104.825,80 109.175,84.35 U2.10
TX_6: D6.2 J2.6 J3.6 J5.6 U2.1 | length 31.9
  Top Layer w0.254: J2.6 93.2,74.75 J5.6 ; J3.6 99.715,87.75 D6.2 101.5,87.8 v1(101.5,88.923)
  Bottom Layer w0.254: J3.6 96.5,81.535 96.5,80.25 100.938,75.812 100.938,74.8 v1(100.987,74.75) ; v1(101.5,88.923) 101.528,88.95 101.528,90.198 U2.1
TX_7: D7.2 J3.7 J5.7 U2.5 | length 26.1
  Top Layer w0.254: J3.7 100.005,85.5 D7.2 101.45,85.577 101.873,86 v1(102.5,86) ; v1(99.5,76) J5.7
  Bottom Layer w0.254: J3.7 95.002,80.495 99.497,76 v1(99.5,76) ; v1(102.5,86) 102.566,86.066 102.901,86.066 106.635,89.8 U2.5
pads on no net: J2.MP1 J2.MP2 J4.5 J4.6 J5.8 J5.9 J10.MP1 J10.MP2 J12.5 J12.6 J13.8 J13.9 J17.1 J17.4 U1.5 U2.9 U2.11 U2.12

## Polygon pours and split planes (outlines as drawn)
3V3_CONN on Bottom Layer "3V3_CONN_L02_P009" (solid, pour order 9): 99.915,68.568 99.915,90.182 101.068,91.335 127,91.335 127,73.415 121,73.415 ccw(c121,73.25) 120.883,73.367 119.883,72.367 ccw(c120,72.25) 119.835,72.25 119.835,68.568 119.182,67.915 100.568,67.915
3V3_TERM on Bottom Layer "3V3_TERM_L02_P008" (solid, pour order 8): 99.585,68.5 99.585,90.25 cw(c99.75,90.25) 99.633,90.367 100.883,91.617 cw(c101,91.5) 101,91.665 127,91.665 127,117.3 ccw(c124.8,117.3) 124.8,119.5 86.45,119.5 ccw(c86.45,117.3) 84.25,117.3 84.25,65.95 ccw(c86.45,65.95) 86.45,63.75 124.8,63.75 ccw(c124.8,65.95) 127,65.95 127,73.085 121.068,73.085 120.165,72.182 120.165,68.5 cw(c120,68.5) 120.117,68.383 119.367,67.633 cw(c119.25,67.75) 119.25,67.585 100.5,67.585 cw(c100.5,67.75) 100.383,67.633 99.633,68.383 cw(c99.75,68.5)
GND on Bottom Layer "NONET_L-01_P-001" (solid, pour order 7): 112,73.25 112,70 118,70 118,73.25
GND on Top Layer "GND_L01_P006" (solid, pour order 6): 84.25,65.95 84.25,117.3 cw(c86.45,117.3) 86.45,119.5 124.8,119.5 cw(c124.8,117.3) 127,117.3 127,65.95 cw(c124.8,65.95) 124.8,63.75 86.45,63.75 cw(c86.45,65.95)

## Silkscreen, mask and mechanical layers (free items; w line width, h text height)
Top Overlay:
  lines w0.254: 84.75,67.75 84.75,117.253 cw(c86.63,117.253) 86.63,119.132 91,119.132 95.882,119.132 cw(c95.882,118.015) 97,118.015 97,107 ccw(c98.118,107) 98.118,105.882 99.632,105.882 cw(c99.632,104.765) 100.75,104.765 100.75,101.75 ccw(c101.868,101.75) 101.868,100.632 104.132,100.632 cw(c104.132,99.515) 105.25,99.515 105.25,65.5 cw(c104.132,65.5) 104.132,64.382 ; 91,64.382 104.382,64.382 ; 106,99.382 106,65.368 ccw(c107.118,65.368) 107.118,64.25 124.62,64.25 ccw(c124.62,66.13) 126.5,66.13 126.5,117.12 ccw(c124.62,117.12) 124.62,119 120.25,119 115.368,119 ccw(c115.368,117.882) 114.25,117.882 114.25,106.868 cw(c113.132,106.868) 113.132,105.75 111.618,105.75 ccw(c111.618,104.632) 110.5,104.632 110.5,101.618 ; 106,99.515 cw(c107.118,99.515) 107.118,100.632 109.382,100.632 ccw(c109.382,101.75) 110.5,101.75 ; 93,78.75 97,78.75 97,85.5 98,85.5 98,90.5 97,90.5 97,98.25 93,98.25 93,78.75 ; 97.5,107.11 ccw(c98.11,107.11) 98.11,106.5 99.624,106.5 cw(c99.624,104.874) 101.25,104.874 101.25,102.114 ccw(c102.114,102.114) 102.114,101.25 109.136,101.25 ccw(c109.136,102.114) 110,102.114 110,104.25 110,104.624 cw(c111.626,104.624) 111.626,106.25 113.14,106.25 ccw(c113.14,106.86) 113.75,106.86 113.75,118.136 ccw(c112.886,118.136) 112.886,119 98.364,119 ccw(c98.364,118.136) 97.5,118.136 97.5,107.11 ; 113,78.75 113,98.25 117,98.25 117,90.5 118,90.5 118,85.5 117,85.5 117,78.75 113,78.75
  text "120Ω" at 104.345,105.1 h2
  text "TERMINATOR / TESTER" at 101.681,102.5 h1.5
  text "TX" at 98.159,79.5 h5
  text "RX" at 107.25,79.5 h5
Bottom Overlay:
  text "HKU ROBOCON | ILO, NOV 2024" at 117.35,80.3 h1.5 r270
  text "CABLE TESTER v2.0" at 118.85,80.3 h3 r270
  text "CABLE TESTER (C): PLUG IN TX AND RX. LEDS WILL TURN ON IN SEQUENTIAL ORDER IF CABLE IS CORRECT. /  / TERMINATOR TESTER (T): PLUG IN TERMINATOR TO RJ9 TX. BACK LED WILL TURN ON IF 120R." at 90,80 h1 r270
  text "C" at 119.778,65.5 h2
  text "T" at 124.728,65.5 h2
Mechanical 1:
  lines w0.254: 84.25,65.75 ccw(c86.25,65.75) 86.25,63.75 125,63.75 ccw(c125,65.75) 127,65.75 127,117.5 ccw(c125,117.5) 125,119.5 86.25,119.5 ccw(c86.25,117.5) 84.25,117.5 84.25,65.75

## Text inside footprints (layer, text, board x,y; h text height)
BT1: Bottom Overlay "-" at 110.507,70.938 h1.5; Bottom Overlay "+" at 95.4,70.95 h1.5